# EAGLE board 32IV 6 LCD temp 2 (EAGLE 9.7.0)

Size 116.02 x 123.5 mm. Coordinates in mm from the lower left corner, seen from the top.
Outline: 0,0 116.02,0 116.02,123.5 0,123.5 0,0
Copper layers (1*16): Top 0.035mm / dielectric 1.5mm / Bottom 0.035mm
Design rules "default": minimum track width 6mil, minimum drill 0.35mm, track to track 6mil, track to pad 6mil, pad to pad 6mil, via to via 6mil, smd to smd 6mil, copper to edge 40mil, drill to drill 6mil, minimum pad ring 10mil, minimum via ring 8mil, stop-mask expansion 4mil, vias tented up to drill 0mil, thermal gap 10mil

## Footprints (pad centres in the part's own frame; a part is rotated, then mirrored left to right if it is on the bottom)
RESAD1016W63L850D250B = drill 0.83 pad 1.43: 1 -5.08,0; 2 5.08,0
JHD-162A = drill 1.016 long: 1 -19.05,0; 2 -16.51,0; 3 -13.97,0; 4 -11.43,0; 5 -8.89,0; 6 -6.35,0; 7 -3.81,0; 8 -1.27,0; 9 1.27,0; 10 3.81,0; 11 6.35,0; 12 8.89,0; 13 11.43,0; 14 13.97,0; 15 16.51,0; 16 19.05,0
TO92 = drill 0.813 octagon: 1 -1.27,0; 2 0,1.905; 3 1.27,0
ARDUINO-UNO-R3-SHIELD = drill 1.016 pad 1.88: 3.3V 24.13,-2.54; 5V 24.13,0; A0 24.13,12.7; A1 24.13,15.24; A2 24.13,17.78; A3 24.13,20.32; A4 24.13,22.86; A5 24.13,25.4; AREF -24.13,-13.97; D2 -24.13,20.32; D3 -24.13,17.78; D4 -24.13,15.24; D5 -24.13,12.7; D6 -24.13,10.16; D7 -24.13,7.62; D8 -24.13,3.81; D9 -24.13,1.27; D10 -24.13,-1.27; D11 -24.13,-3.81; D12 -24.13,-6.35; D13 -24.13,-8.89; GND@0 24.13,2.54; GND@1 24.13,5.08; GND@2 -24.13,-11.43; IOREF 24.13,-7.62; NC 24.13,-10.16; RES 24.13,-5.08; RX -24.13,25.4; SCL -24.13,-19.05; SDA -24.13,-16.51; TX -24.13,22.86; VIN 24.13,7.62

## Placement (x,y rotation side)
R1  220  [RESAD1016W63L850D250B]  79.44,114.53 90 top
U3  LCD-16X2JHD-162A  [JHD-162A]  60.39,99.41 0 top
U6  TMP36GT9Z_TO92  [TO92]  89.6,104.37 0 top
U8  ARDUINO-UNO-R3-SHIELD  [ARDUINO-UNO-R3-SHIELD]  47.88,29.84 270 top

## Library data of the parts
R1 U3 U6 U8 = Tinkercad

## Nets
U3_LED-: R1.1 U3.16
U8_5V: U3.2 U3.15 U6.3 U8.5V
U8_A1: U6.2 U8.A1
U8_D2: U3.14 U8.D2
U8_D3: U3.13 U8.D3
U8_D4: U3.12 U8.D4
U8_D5: U3.11 U8.D5
U8_D11: U3.6 U8.D11
U8_D12: U3.4 U8.D12
U8_GND: R1.2 U3.1 U3.3 U3.5 U6.1 U8.GND@0 U8.GND@1 U8.GND@2

## Tracks (layer width: path | path; a pad name or v marks a point on that pad's centre or on a via)
U3_LED-  (1 unrouted)
U8_5V  (3 unrouted)
U8_A1  (1 unrouted)
U8_D2  (1 unrouted)
U8_D3  (1 unrouted)
U8_D4  (1 unrouted)
U8_D5  (1 unrouted)
U8_D11  (1 unrouted)
U8_D12  (1 unrouted)
U8_GND  (7 unrouted)